# EAGLE board Dual Sequencer (EAGLE 6.6.0)

Size 245 x 150 mm. Coordinates in mm from the lower left corner, seen from the top.
Outline: 0,0 0,150 245,150 245,0 0,0
Copper layers (1*16): Top 0.035mm / dielectric 1.5mm / Bottom 0.035mm
Design rules "default": minimum track width 10mil, minimum drill 24mil, track to track 8mil, track to pad 8mil, pad to pad 8mil, via to via 8mil, smd to smd 8mil, copper to edge 40mil, drill to drill 8mil, minimum pad ring 10mil, minimum via ring 8mil, stop-mask expansion 4mil, vias tented up to drill 0mil, thermal gap 10mil

## Placement (x,y rotation side)
E$1  [KNOB_BOSS_MEDIUM]  14,75 0 top
E$2  [KNOB_BOSS_MEDIUM]  231,75 0 top
E$3  [KNOB_BOSS_MEDIUM]  45,75 0 top
E$4  [KNOB_BOSS_MEDIUM]  76,75 0 top
E$5  [KNOB_BOSS_MEDIUM]  107,75 0 top
E$6  [KNOB_BOSS_MEDIUM]  138,75 0 top
E$7  [KNOB_BOSS_MEDIUM]  169,75 0 top
E$8  [KNOB_BOSS_MEDIUM]  200,75 0 top
E$9  [LED_3MM]  14,92 0 top
E$10  [LED_3MM]  45,92 0 top
E$11  [LED_3MM]  76,92 0 top
E$12  [LED_3MM]  107,92 0 top
E$13  [LED_3MM]  138,92 0 top
E$14  [LED_3MM]  169,92 0 top
E$15  [LED_3MM]  200,92 0 top
E$16  [LED_3MM]  231,92 0 top
E$17  [LED_3MM]  14,58 0 top
E$18  [LED_3MM]  45,58 0 top
E$19  [LED_3MM]  76,58 0 top
E$20  [LED_3MM]  107,58 0 top
E$21  [LED_3MM]  138,58 0 top
E$22  [LED_3MM]  169,58 0 top
E$23  [LED_3MM]  200,58 0 top
E$24  [LED_3MM]  231,58 0 top

## Library data of the parts
E$1-E$24 = !synth_panel